# Altium PCB AX301_AX4010.PcbDoc (part 10 of 10)
Units mil, origin at the board's own origin, x right, y up, seen from the top; angles counter-clockwise.
Board outline 5185 x 3614 mil, 4 copper layers (Top Layer, GND, Mid-Layer 1, Bottom Layer); 191 components, 338 nets, 1108 pads, 420 vias.
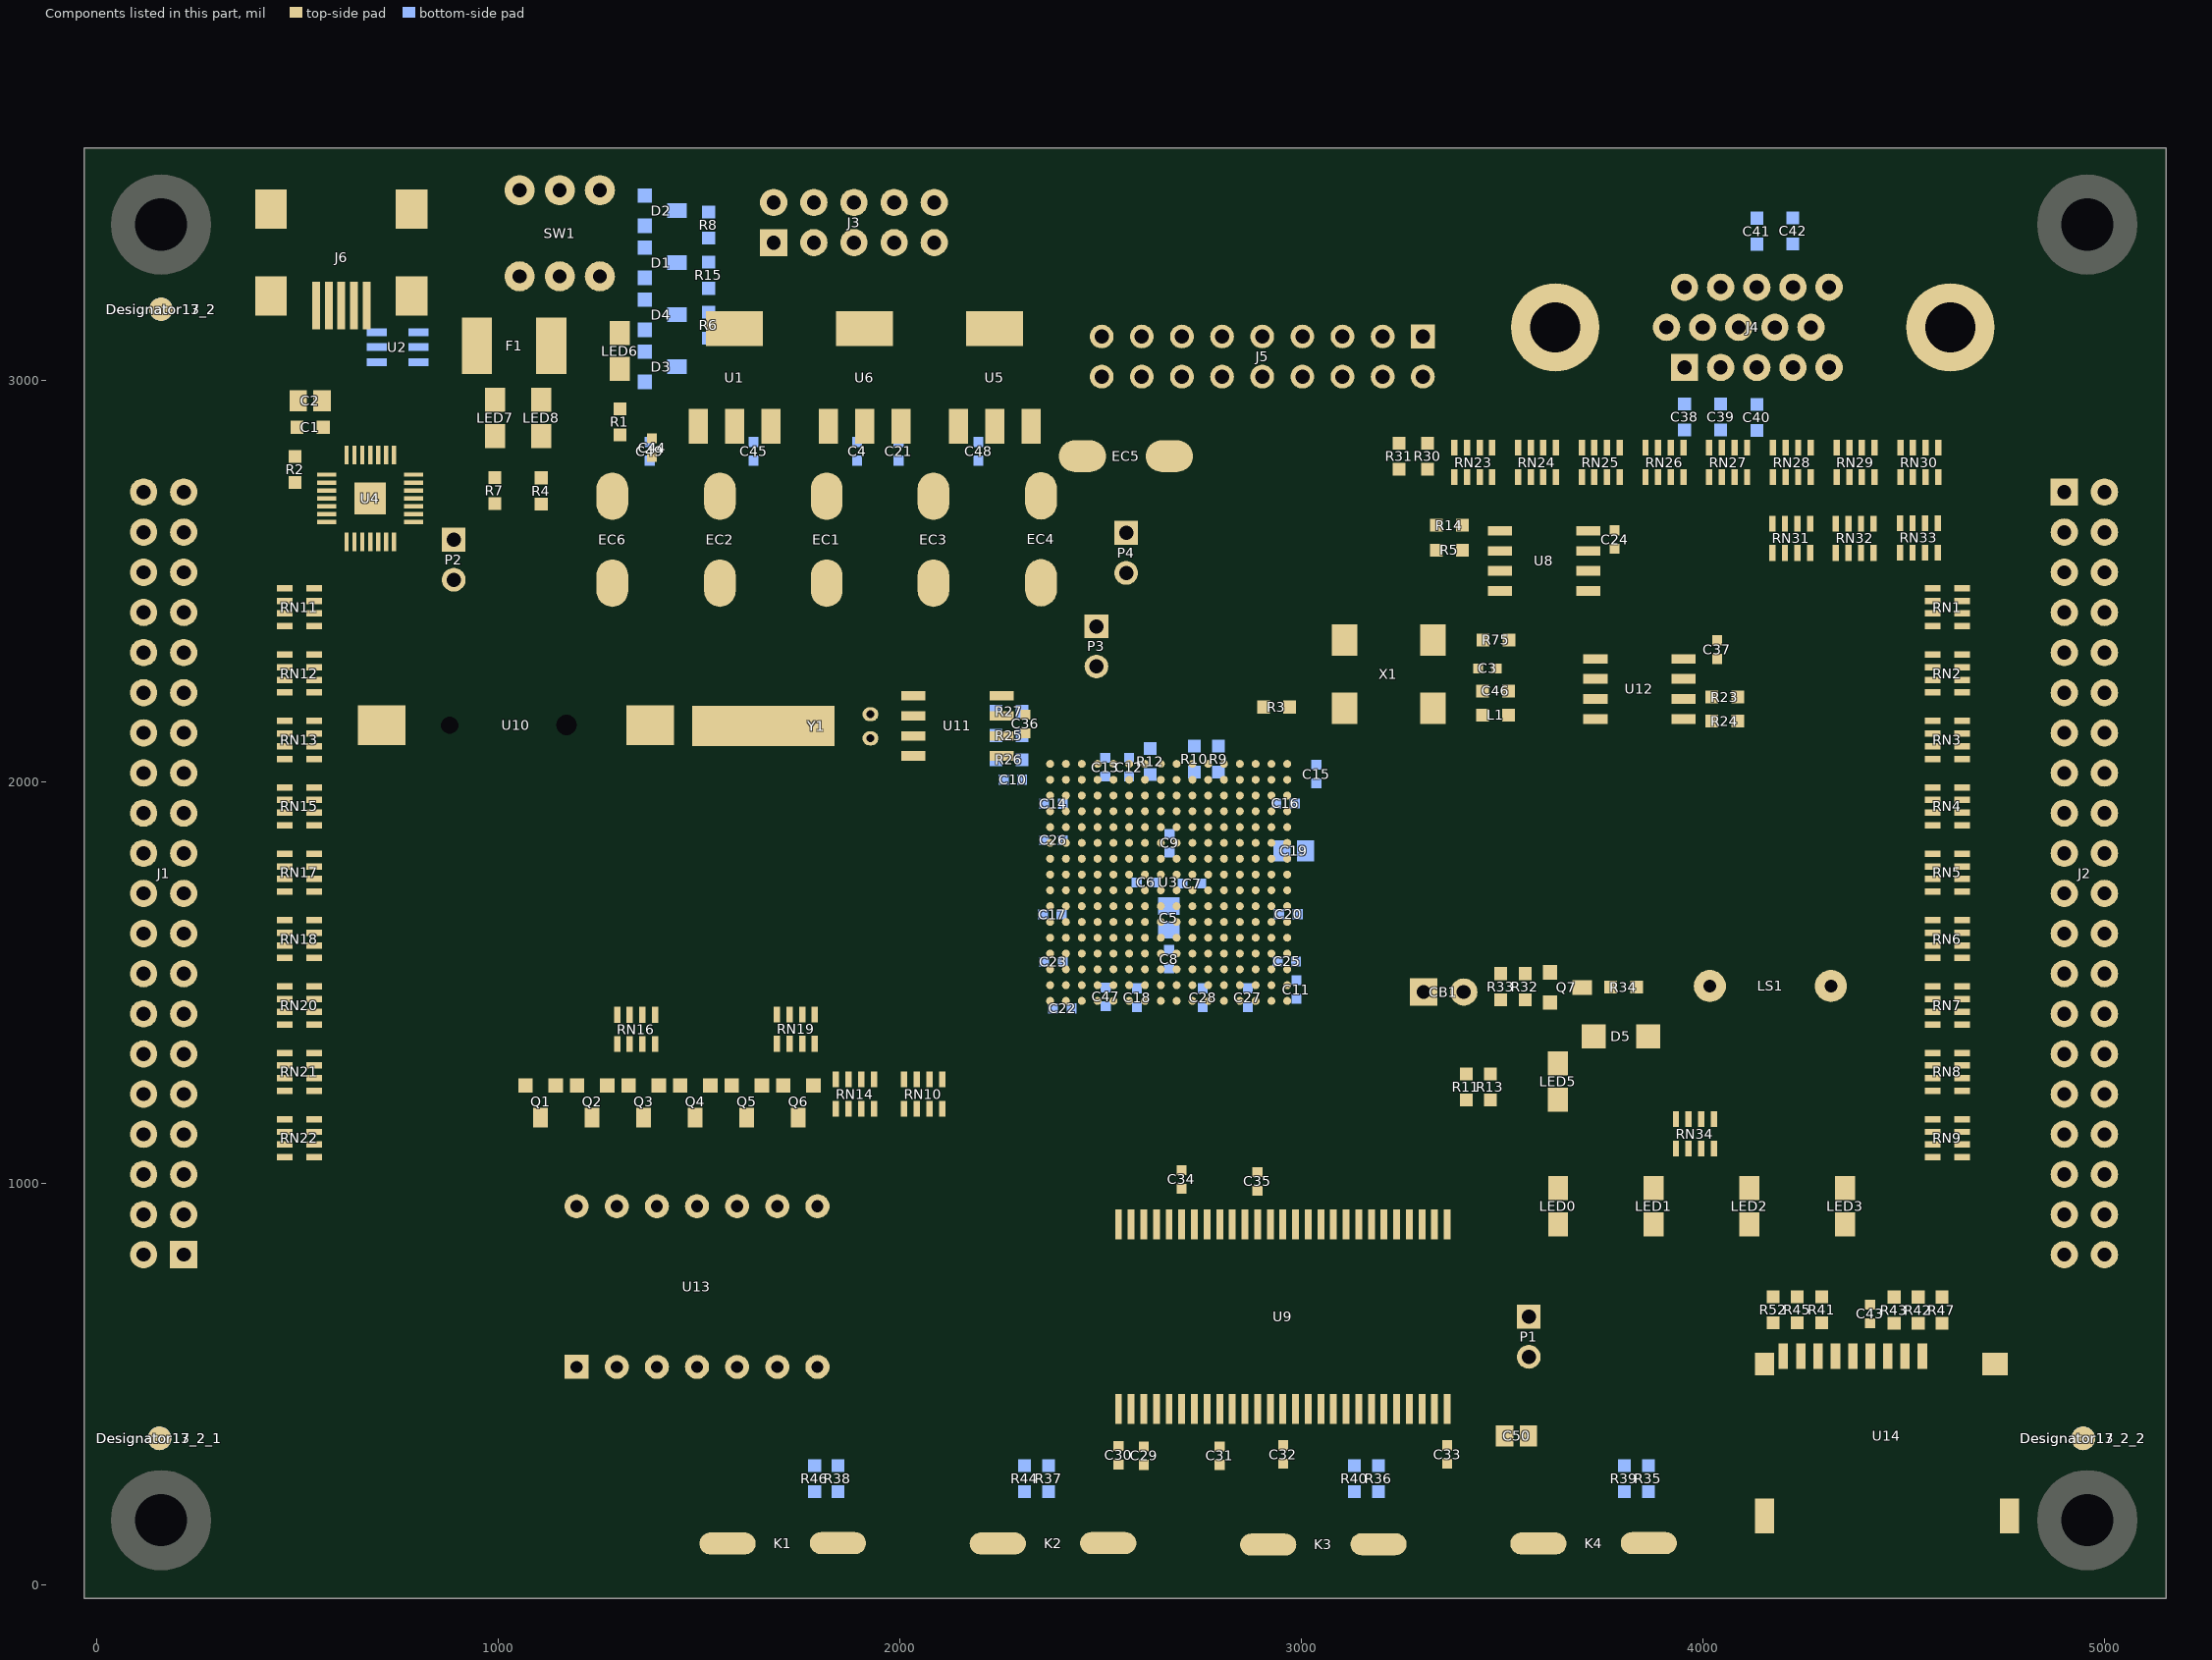
[diagram p12: the components of this part, seen from the top]

## Via types
v1: diameter 20, hole 10, Top Layer to Bottom Layer, 377 vias
v2: diameter 30, hole 15, Top Layer to Bottom Layer, 41 vias
v3: diameter 40, hole 20, Top Layer to Bottom Layer, 2 vias

## Nets (pads, with @x,y where several pads share a name; then routed paths per layer and width w, separated by ;. In a path a pad name is that pad's centre, name@x,y a point inside that pad or via, vN(x,y) a via of type N, cw(c..) or ccw(c..) an arc to the next point about the centre after c; other vN are vias at no path point) (continued)
copper on no net: (continued)
  Top Layer w0.65: 1038.8,73.7 1089.72,73.7 ; 1039.45,74.35 1090.37,74.35 ; 1039.45,75 1091.02,75 ; 1039.45,75.65 1091.67,75.65 ; 1039.45,76.3 1091.67,76.3 ; 1039.45,76.95 1092.32,76.95 ; 1040.1,77.6 1092.97,77.6 ; 1040.1,78.25 1093.62,78.25 ; 1040.1,78.9 1094.27,78.9 ; 1040.1,79.55 1094.92,79.55 ; 1040.75,80.2 1095.57,80.2 ; 1040.75,80.85 1096.22,80.85 ; 1040.75,81.5 1096.87,81.5 ; 1040.75,82.15 1097.52,82.15 ; 1040.75,82.8 1098.17,82.8 ; 1041.4,83.45 1098.17,83.45 ; 1041.4,84.1 1098.82,84.1 ; 1041.4,84.75 1099.47,84.75 ; 1041.4,85.4 1100.12,85.4 ; 1041.4,86.05 1100.77,86.05 ; 1042.05,86.7 1101.42,86.7 ; 1042.05,87.35 1102.07,87.35 ; 1042.05,88 1102.72,88 ; 1042.05,88.65 1103.37,88.65 ; 1042.7,89.3 1104.02,89.3 ; 1042.7,89.95 1104.67,89.95 ; 1042.7,90.6 1105.32,90.6 ; 1042.7,91.25 1105.32,91.25 ; 1042.7,91.9 1105.97,91.9 ; 1043.35,92.55 1106.62,92.55 ; 1043.35,93.2 1107.27,93.2 ; 1043.35,93.85 1107.92,93.85 ; 1043.35,94.5 1108.57,94.5 ; 1043.35,95.15 1109.22,95.15 ; 1044,95.8 1109.87,95.8 ; 1044,96.45 1110.52,96.45 ; 1044,97.1 1111.17,97.1 ; 1044,97.75 1111.82,97.75 ; 1044.65,98.4 1112.47,98.4 ; 1044.65,99.05 1112.47,99.05 ; 1044.65,99.7 1113.12,99.7 ; 1044.65,100.35 1113.77,100.35 ; 1044.65,101 1114.42,101 ; 1045.3,101.65 1115.07,101.65 ; 1045.3,102.3 1115.72,102.3 ; 1045.3,102.95 1116.37,102.95 ; 1045.3,103.6 1117.02,103.6 ; 1045.95,104.25 1117.67,104.25 ; 1045.95,104.9 1118.32,104.9 ; 1045.95,105.55 1118.97,105.55 ; 1045.95,106.2 1118.97,106.2 ; 1045.95,106.85 1119.62,106.85 ; 1046.6,107.5 1120.27,107.5 ; 1046.6,108.15 1120.92,108.15 ; 1046.6,108.8 1121.57,108.8 ; 1046.6,109.45 1122.22,109.45 ; 1046.6,110.1 1122.87,110.1 ; 1047.25,110.75 1123.52,110.75 ; 1047.25,111.4 1124.17,111.4 ; 1047.25,112.05 1124.82,112.05 ; 1047.25,112.7 1125.47,112.7 ; 1047.9,113.35 1126.12,113.35 ; 1047.9,114 1126.12,114 ; 1047.9,114.65 1126.77,114.65 ; 1047.9,115.3 1127.42,115.3 ; 1047.9,115.95 1128.07,115.95 ; 1048.55,116.6 1128.72,116.6 ; 1048.55,117.25 1129.37,117.25 ; 1048.55,117.9 1130.02,117.9 ; 1048.55,118.55 1130.67,118.55 ; 1048.55,119.2 1131.32,119.2 ; 1049.2,119.85 1131.97,119.85 ; 1049.2,120.5 1132.62,120.5 ; 1049.2,121.15 1133.27,121.15 ; 1049.2,121.8 1133.27,121.8 ; 1049.85,122.45 1133.92,122.45 ; 1049.85,123.1 1134.57,123.1 ; 1049.85,123.75 1135.22,123.75 ; 1049.85,124.4 1135.87,124.4 ; 1049.85,125.05 1136.52,125.05 ; 1050.5,125.7 1137.17,125.7 ; 1050.5,126.35 1137.82,126.35 ; 1050.5,127 1138.47,127 ; 1050.5,127.65 1139.12,127.65 ; 1050.5,128.3 1139.77,128.3 ; 1051.15,128.95 1139.77,128.95 ; 1051.15,129.6 1140.42,129.6 ; 1051.15,130.25 1141.07,130.25 ; 1051.15,130.9 1141.72,130.9 ; 1051.8,131.55 1142.37,131.55 ; 1051.8,132.2 1143.02,132.2 ; 1051.8,132.85 1143.67,132.85 ; 1051.8,133.5 1144.32,133.5 ; 1051.8,134.15 1144.97,134.15 ; 1052.45,134.8 1145.62,134.8 ; 1052.45,135.45 1146.27,135.45 ; 1052.45,136.1 1146.92,136.1 ; 1052.45,136.75 1146.92,136.75 ; 1052.45,137.4 1147.57,137.4 ; 1053.1,138.05 1148.22,138.05 ; 1053.1,138.7 1148.87,138.7 ; 1053.1,139.35 1149.52,139.35 ; 1053.1,140 1150.17,140 ; 1053.75,140.65 1150.82,140.65 ; 1053.75,141.3 1151.47,141.3 ; 1053.75,141.95 1152.12,141.95 ; 1053.75,142.6 1152.77,142.6 ; 1053.75,143.25 1152.12,143.25 ; 1054.4,143.9 1152.12,143.9 ; 1054.4,144.55 1151.47,144.55 ; 1054.4,145.2 1150.82,145.2 ; 1054.4,145.85 1150.82,145.85 ; 1054.4,146.5 1150.17,146.5 ; 1055.05,147.15 1150.17,147.15 ; 1055.05,147.8 1149.52,147.8 ; 1055.05,148.45 1149.52,148.45 ; 1055.05,149.1 1148.87,149.1 ; 1055.7,149.75 1148.22,149.75 ; 1055.7,150.4 1148.22,150.4 ; 1055.7,151.05 1147.57,151.05 ; 1055.7,151.7 1147.57,151.7 ; 1055.7,152.35 1146.92,152.35 ; 1056.35,153 1146.92,153 ; 1056.35,153.65 1146.27,153.65 ; 1056.35,154.3 1146.27,154.3 ; 1056.35,154.95 1145.62,154.95 ; 1057,155.6 1144.97,155.6 ; 1057,156.25 1144.97,156.25 ; 1057,156.9 1144.32,156.9 ; 1057,157.55 1144.32,157.55 ; 1057,158.2 1143.67,158.2 ; 1057.65,158.85 1143.67,158.85 ; 1057.65,159.5 1143.02,159.5 ; 1057.65,160.15 1142.37,160.15 ; 1057.65,160.8 1142.37,160.8 ; 1057.65,161.45 1141.72,161.45 ; 1058.3,162.1 1141.72,162.1 ; 1058.3,162.75 1141.07,162.75 ; 1058.3,163.4 1141.07,163.4 ; 1058.3,164.05 1140.42,164.05 ; 1058.95,164.7 1139.77,164.7 ; 1058.95,165.35 1139.77,165.35 ; 1058.95,166 1139.12,166 ; 1058.95,166.65 1139.12,166.65 ; 1058.95,167.3 1138.47,167.3 ; 1059.6,167.95 1138.47,167.95 ; 1059.6,168.6 1137.82,168.6 ; 1059.6,169.25 1137.17,169.25 ; 1059.6,169.9 1137.17,169.9 ; 1059.6,170.55 1136.52,170.55 ; 1060.25,171.2 1136.52,171.2 ; 1060.25,171.85 1135.87,171.85 ; 1060.25,172.5 1135.87,172.5 ; 1060.25,173.15 1135.22,173.15 ; 1060.9,173.8 1134.57,173.8 ; 1060.9,174.45 1134.57,174.45 ; 1060.9,175.1 1133.92,175.1 ; 1060.9,175.75 1133.92,175.75 ; 1060.9,176.4 1133.27,176.4 ; 1061.55,177.05 1133.27,177.05 ; 1061.55,177.7 1132.62,177.7 ; 1061.55,178.35 1131.97,178.35 ; 1061.55,179 1131.97,179 ; 1061.55,179.65 1131.32,179.65 ; 1062.2,180.3 1131.32,180.3 ; 1062.2,180.95 1130.67,180.95 ; 1062.2,181.6 1130.67,181.6 ; 1062.2,182.25 1130.02,182.25 ; 1062.85,182.9 1130.02,182.9 ; 1062.85,183.55 1129.37,183.55 ; 1062.85,184.2 1128.72,184.2 ; 1062.85,184.85 1128.72,184.85 ; 1062.85,185.5 1128.07,185.5 ; 1063.5,186.15 1128.07,186.15 ; 1063.5,186.8 1127.42,186.8 ; 1063.5,187.45 1127.42,187.45 ; 1063.5,188.1 1126.77,188.1 ; 1063.5,188.75 1126.12,188.75 ; 1064.15,189.4 1126.12,189.4 ; 1064.15,190.05 1125.47,190.05 ; 1064.15,190.7 1125.47,190.7 ; 1064.15,191.35 1124.82,191.35 ; 1064.8,192 1124.82,192 ; 1064.8,192.65 1124.17,192.65 ; 1064.8,193.3 1123.52,193.3 ; 1064.8,193.95 1123.52,193.95 ; 1064.8,194.6 1122.87,194.6 ; 1065.45,195.25 1122.87,195.25 ; 1065.45,195.9 1122.22,195.9 ; 1065.45,196.55 1122.22,196.55 ; 1065.45,197.2 1121.57,197.2 ; 1065.45,197.85 1120.92,197.85 ; 1066.1,198.5 1120.92,198.5 ; 1066.1,199.15 1120.27,199.15 ; 1066.1,199.8 1120.27,199.8 ; 1066.1,200.45 1119.62,200.45 ; 1066.75,201.1 1119.62,201.1 ; 1066.75,201.75 1118.97,201.75 ; 1066.75,202.4 1118.32,202.4 ; 1066.75,203.05 1118.32,203.05 ; 1066.75,203.7 1117.67,203.7 ; 1067.4,204.35 1117.67,204.35 ; 1067.4,205 1117.02,205 ; 1067.4,205.65 1117.02,205.65 ; 1067.4,206.3 1116.37,206.3 ; 1068.05,206.95 1116.37,206.95 ; 1068.05,207.6 1115.72,207.6 ; 1068.05,208.25 1115.07,208.25 ; 1068.05,208.9 1115.07,208.9 ; 1068.05,209.55 1114.42,209.55 ; 1068.7,210.2 1114.42,210.2 ; 1068.7,210.85 1113.77,210.85 ; 1068.7,211.5 1113.77,211.5 ; 1068.7,212.15 1113.12,212.15 ; 1068.7,212.8 1112.47,212.8 ; 1069.35,213.45 1112.47,213.45 ; 1069.35,214.1 1111.82,214.1 ; 1069.35,214.75 1111.82,214.75 ; 1069.35,215.4 1111.17,215.4 ; 1070,216.05 1111.17,216.05 ; 1070,216.7 1110.52,216.7 ; 1070,217.35 1109.87,217.35 ; 1070,218 1109.87,218 ; 1070,218.65 1109.22,218.65 ; 1070.65,219.3 1109.22,219.3 ; 1070.65,219.95 1108.57,219.95 ; 1070.65,220.6 1108.57,220.6 ; 1070.65,221.25 1107.92,221.25 ; 1070.65,221.9 1107.27,221.9 ; 1071.3,222.55 1107.27,222.55 ; 1071.3,223.2 1106.62,223.2 ; 1135.65,50.95 1215.82,50.95 ; 1135.65,51.6 1215.17,51.6 ; 1136.3,52.25 1215.17,52.25 ; 1136.95,52.9 1214.52,52.9 ; 1137.6,53.55 1214.52,53.55 ; 1138.25,54.2 1213.87,54.2 ; 1138.9,54.85 1213.22,54.85 ; 1139.55,55.5 1213.22,55.5 ; 1139.55,56.15 1212.57,56.15 ; 1140.2,56.8 1212.57,56.8 ; 1140.85,57.45 1211.92,57.45 ; 1141.5,58.1 1211.92,58.1 ; 1142.15,58.75 1211.27,58.75 ; 1142.8,59.4 1211.27,59.4 ; 1143.45,60.05 1210.62,60.05 ; 1143.45,60.7 1210.62,60.7 ; 1144.1,61.35 1209.97,61.35 ; 1144.75,62 1209.97,62 ; 1145.4,62.65 1209.32,62.65 ; 1146.05,63.3 1209.32,63.3 ; 1146.7,63.95 1208.67,63.95 ; 1147.35,64.6 1208.67,64.6 ; 1147.35,65.25 1208.02,65.25 ; 1148,65.9 1208.02,65.9 ; 1148.65,66.55 1207.37,66.55 ; 1149.3,67.2 1207.37,67.2 ; 1149.95,67.85 1206.72,67.85 ; 1150.6,68.5 1206.72,68.5 ; 1151.25,69.15 1206.07,69.15 ; 1151.25,69.8 1206.07,69.8 ; 1151.9,70.45 1205.42,70.45 ; 1152.55,71.1 1204.77,71.1 ; 1153.2,71.75 1204.77,71.75 ; 1153.85,72.4 1204.12,72.4 ; 1154.5,73.05 1204.12,73.05 ; 1154.5,141.3 1167.72,141.3 ; 1154.5,141.95 1167.72,141.95 ; 1154.5,142.6 1167.72,142.6 ; 1155.15,73.7 1203.47,73.7 ; 1155.15,74.35 1203.47,74.35 ; 1155.15,140 1168.37,140 ; 1155.15,140.65 1168.37,140.65 ; 1155.15,143.25 1168.37,143.25 ; 1155.8,75 1202.82,75 ; 1155.8,138.7 1169.02,138.7 ; 1155.8,139.35 1169.02,139.35 ; 1155.8,143.9 1169.02,143.9 ; 1156.45,75.65 1202.82,75.65 ; 1156.45,137.4 1170.32,137.4 ; 1156.45,138.05 1169.67,138.05 ; 1156.45,144.55 1169.67,144.55 ; 1157.1,76.3 1202.17,76.3 ; 1157.1,136.1 1170.97,136.1 ; 1157.1,136.75 1170.32,136.75 ; 1157.1,145.2 1170.32,145.2 ; 1157.75,76.95 1202.17,76.95 ; 1157.75,134.8 1171.62,134.8 ; 1157.75,135.45 1170.97,135.45 ; 1157.75,145.85 1170.97,145.85 ; 1158.4,77.6 1201.52,77.6 ; 1158.4,133.5 1172.27,133.5 ; 1158.4,134.15 1171.62,134.15 ; 1158.4,146.5 1171.62,146.5 ; 1159.05,78.25 1201.52,78.25 ; 1159.05,78.9 1200.87,78.9 ; 1159.05,132.85 1172.27,132.85 ; 1159.05,147.15 1172.27,147.15 ; 1159.7,79.55 1200.87,79.55 ; 1159.7,131.55 1172.92,131.55 ; 1159.7,132.2 1172.92,132.2 ; 1159.7,147.8 1172.92,147.8 ; 1160.35,80.2 1200.22,80.2 ; 1160.35,130.25 1173.57,130.25 ; 1160.35,130.9 1173.57,130.9 ; 1160.35,148.45 1173.57,148.45 ; 1161,80.85 1200.22,80.85 ; 1161,128.95 1174.22,128.95 ; 1161,129.6 1174.22,129.6 ; 1161,149.1 1174.22,149.1 ; 1161.65,81.5 1199.57,81.5 ; 1161.65,127.65 1174.87,127.65 ; 1161.65,128.3 1174.87,128.3 ; 1161.65,149.75 1174.87,149.75 ; 1162.3,82.15 1199.57,82.15 ; 1162.3,126.35 1175.52,126.35 ; 1162.3,127 1175.52,127 ; 1162.3,150.4 1175.52,150.4 ; 1162.95,82.8 1198.92,82.8 ; 1162.95,83.45 1198.92,83.45 ; 1162.95,125.05 1176.82,125.05 ; 1162.95,125.7 1176.17,125.7 ; 1162.95,151.05 1176.17,151.05 ; 1163.6,84.1 1198.27,84.1 ; 1163.6,123.75 1177.47,123.75 ; 1163.6,124.4 1176.82,124.4 ; 1163.6,151.7 1176.82,151.7 ; 1163.6,222.55 1242.47,222.55 ; 1163.6,223.2 1243.12,223.2 ; 1164.25,84.75 1198.27,84.75 ; 1164.25,122.45 1178.12,122.45 ; 1164.25,123.1 1177.47,123.1 ; 1164.25,152.35 1177.47,152.35 ; 1164.25,221.25 1241.17,221.25 ; 1164.25,221.9 1241.82,221.9 ; 1164.9,85.4 1197.62,85.4 ; 1164.9,121.15 1178.77,121.15 ; 1164.9,121.8 1178.12,121.8 ; 1164.9,153 1178.12,153 ; 1164.9,219.95 1239.87,219.95 ; 1164.9,220.6 1240.52,220.6 ; 1165.55,86.05 1197.62,86.05 ; 1165.55,120.5 1178.77,120.5 ; 1165.55,153.65 1178.77,153.65 ; 1165.55,218.65 1239.22,218.65 ; 1165.55,219.3 1239.22,219.3 ; 1166.2,86.7 1196.97,86.7 ; 1166.2,119.2 1179.42,119.2 ; 1166.2,119.85 1179.42,119.85 ; 1166.2,154.3 1179.42,154.3 ; 1166.2,217.35 1237.92,217.35 ; 1166.2,218 1238.57,218 ; 1166.85,87.35 1196.32,87.35 ; 1166.85,88 1196.32,88 ; 1166.85,117.9 1180.07,117.9 ; 1166.85,118.55 1180.07,118.55 ; 1166.85,154.95 1180.07,154.95 ; 1166.85,216.05 1236.62,216.05 ; 1166.85,216.7 1237.27,216.7 ; 1167.5,88.65 1195.67,88.65 ; 1167.5,116.6 1180.72,116.6 ; 1167.5,117.25 1180.72,117.25 ; 1167.5,155.6 1180.72,155.6 ; 1167.5,214.75 1235.32,214.75 ; 1167.5,215.4 1235.97,215.4 ; 1168.15,89.3 1195.67,89.3 ; 1168.15,115.3 1181.37,115.3 ; 1168.15,115.95 1181.37,115.95 ; 1168.15,156.25 1181.37,156.25 ; 1168.15,213.45 1234.67,213.45 ; 1168.15,214.1 1234.67,214.1 ; 1168.8,89.95 1195.02,89.95 ; 1168.8,114 1182.02,114 ; 1168.8,114.65 1182.02,114.65 ; 1168.8,156.9 1182.02,156.9 ; 1168.8,212.15 1233.37,212.15 ; 1168.8,212.8 1234.02,212.8 ; 1169.45,90.6 1195.02,90.6 ; 1169.45,112.7 1183.32,112.7 ; 1169.45,113.35 1182.67,113.35 ; 1169.45,157.55 1182.67,157.55 ; 1169.45,210.85 1232.07,210.85 ; 1169.45,211.5 1232.72,211.5 ; 1170.1,91.25 1194.37,91.25 ; 1170.1,111.4 1183.97,111.4 ; 1170.1,112.05 1183.32,112.05 ; 1170.1,158.2 1183.32,158.2 ; 1170.1,209.55 1230.77,209.55 ; 1170.1,210.2 1231.42,210.2 ; 1170.75,91.9 1194.37,91.9 ; 1170.75,92.55 1193.72,92.55 ; 1170.75,110.1 1184.62,110.1 ; 1170.75,110.75 1183.97,110.75 ; 1170.75,158.85 1183.97,158.85 ; 1170.75,208.25 1230.12,208.25 ; 1170.75,208.9 1230.12,208.9 ; 1171.4,93.2 1193.72,93.2 ; 1171.4,108.8 1185.27,108.8 ; 1171.4,109.45 1184.62,109.45 ; 1171.4,159.5 1184.62,159.5 ; 1171.4,206.95 1228.82,206.95 ; 1171.4,207.6 1229.47,207.6 ; 1172.05,93.85 1193.07,93.85 ; 1172.05,108.15 1185.27,108.15 ; 1172.05,160.15 1185.27,160.15 ; 1172.05,205.65 1227.52,205.65 ; 1172.05,206.3 1228.17,206.3 ; 1172.7,94.5 1193.07,94.5 ; 1172.7,106.85 1185.92,106.85 ; 1172.7,107.5 1185.92,107.5 ; 1172.7,160.8 1185.92,160.8 ; 1172.7,205 1226.87,205 ; 1173.35,95.15 1192.42,95.15 ; 1173.35,105.55 1186.57,105.55 ; 1173.35,106.2 1186.57,106.2 ; 1173.35,161.45 1186.57,161.45 ; 1173.35,203.7 1225.57,203.7 ; 1173.35,204.35 1226.22,204.35 ; 1174,95.8 1192.42,95.8 ; 1174,104.25 1187.22,104.25 ; 1174,104.9 1187.22,104.9 ; 1174,162.1 1187.22,162.1 ; 1174,202.4 1224.92,202.4 ; 1174,203.05 1224.92,203.05 ; 1174.65,96.45 1191.77,96.45 ; 1174.65,97.1 1191.77,97.1 ; 1174.65,102.95 1187.87,102.95 ; 1174.65,103.6 1187.87,103.6 ; 1174.65,162.75 1187.87,162.75 ; 1174.65,201.1 1223.62,201.1 ; 1174.65,201.75 1224.27,201.75 ; 1175.3,97.75 1191.12,97.75 ; 1175.3,101.65 1189.17,101.65 ; 1175.3,102.3 1188.52,102.3 ; 1175.3,163.4 1188.52,163.4 ; 1175.3,199.8 1222.32,199.8 ; 1175.3,200.45 1222.97,200.45 ; 1175.95,98.4 1191.12,98.4 ; 1175.95,100.35 1189.82,100.35 ; 1175.95,101 1189.17,101 ; 1175.95,164.05 1189.17,164.05 ; 1175.95,198.5 1221.02,198.5 ; 1175.95,199.15 1221.67,199.15 ; 1176.6,99.05 1189.82,99.05 ; 1176.6,99.7 1189.82,99.7 ; 1176.6,164.7 1189.82,164.7 ; 1176.6,197.2 1220.37,197.2 ; 1176.6,197.85 1220.37,197.85 ; 1177.25,165.35 1190.47,165.35 ; 1177.25,195.9 1219.07,195.9 ; 1177.25,196.55 1219.72,196.55 ; 1177.9,166 1191.12,166 ; 1177.9,194.6 1217.77,194.6 ; 1177.9,195.25 1218.42,195.25 ; 1178.55,166.65 1191.77,166.65 ; 1178.55,193.3 1216.47,193.3 ; 1178.55,193.95 1217.12,193.95 ; 1179.2,167.3 1192.42,167.3 ; 1179.2,192 1215.82,192 ; 1179.2,192.65 1215.82,192.65 ; 1179.85,167.95 1193.07,167.95 ; 1179.85,190.7 1214.52,190.7 ; 1179.85,191.35 1215.17,191.35 ; 1180.5,168.6 1193.72,168.6 ; 1180.5,189.4 1213.22,189.4 ; 1180.5,190.05 1213.87,190.05 ; 1181.15,169.25 1194.37,169.25 ; 1181.15,188.1 1211.92,188.1 ; 1181.15,188.75 1212.57,188.75 ; 1181.8,169.9 1195.67,169.9 ; 1181.8,186.8 1210.62,186.8 ; 1181.8,187.45 1211.27,187.45 ; 1182.45,170.55 1196.32,170.55 ; 1182.45,186.15 1210.62,186.15 ; 1183.1,171.2 1196.97,171.2 ; 1183.1,184.85 1209.32,184.85 ; 1183.1,185.5 1209.97,185.5 ; 1183.75,171.85 1197.62,171.85 ; 1183.75,183.55 1208.02,183.55 ; 1183.75,184.2 1208.67,184.2 ; 1184.4,172.5 1198.27,172.5 ; 1184.4,182.25 1206.72,182.25 ; 1184.4,182.9 1207.37,182.9 ; 1185.05,173.15 1198.92,173.15 ; 1185.05,180.95 1206.07,180.95 ; 1185.05,181.6 1206.07,181.6 ; 1185.7,173.8 1199.57,173.8 ; 1185.7,179.65 1204.77,179.65 ; 1185.7,180.3 1205.42,180.3 ; 1186.35,174.45 1200.22,174.45 ; 1186.35,178.35 1203.47,178.35 ; 1186.35,179 1204.12,179 ; 1187,175.1 1200.87,175.1 ; 1187,177.05 1202.17,177.05 ; 1187,177.7 1202.82,177.7 ; 1187.65,175.75 1201.52,175.75 ; 1187.65,176.4 1201.52,176.4 ; 1226.65,134.15 1332.82,134.15 ; 1226.65,134.8 1332.82,134.8 ; 1226.65,135.45 1332.82,135.45 ; 1227.3,133.5 1332.82,133.5 ; 1227.3,136.1 1332.82,136.1 ; 1227.95,132.2 1332.82,132.2 ; 1227.95,132.85 1332.82,132.85 ; 1227.95,136.75 1332.82,136.75 ; 1228.6,130.9 1332.82,130.9 ; 1228.6,131.55 1332.82,131.55 ; 1228.6,137.4 1332.82,137.4 ; 1229.25,129.6 1332.82,129.6 ; 1229.25,130.25 1332.82,130.25 ; 1229.25,138.05 1332.82,138.05 ; 1229.9,128.3 1332.82,128.3 ; 1229.9,128.95 1332.82,128.95 ; 1229.9,138.7 1332.82,138.7 ; 1230.55,127 1332.82,127 ; 1230.55,127.65 1332.82,127.65 ; 1230.55,139.35 1332.82,139.35 ; 1231.2,125.7 1332.82,125.7 ; 1231.2,126.35 1332.82,126.35 ; 1231.2,140 1332.82,140 ; 1231.85,125.05 1332.82,125.05 ; 1231.85,140.65 1332.82,140.65 ; 1232.5,123.75 1332.82,123.75 ; 1232.5,124.4 1332.82,124.4 ; 1232.5,141.3 1332.82,141.3 ; 1233.15,122.45 1332.82,122.45 ; 1233.15,123.1 1332.82,123.1 ; 1233.15,141.95 1332.82,141.95 ; 1233.8,121.15 1332.82,121.15 ; 1233.8,121.8 1332.82,121.8 ; 1233.8,142.6 1332.82,142.6 ; 1234.45,119.85 1332.82,119.85 ; 1234.45,120.5 1332.82,120.5 ; 1234.45,143.25 1332.82,143.25 ; 1235.1,118.55 1332.82,118.55 ; 1235.1,119.2 1332.82,119.2 ; 1235.1,143.9 1332.82,143.9 ; 1235.1,144.55 1332.82,144.55 ; 1235.75,117.25 1332.82,117.25 ; 1235.75,117.9 1332.82,117.9 ; 1235.75,145.2 1332.82,145.2 ; 1236.4,115.95 1332.82,115.95 ; 1236.4,116.6 1332.82,116.6 ; 1236.4,145.85 1332.82,145.85 ; 1237.05,115.3 1332.82,115.3 ; 1237.05,146.5 1332.82,146.5 ; 1237.7,114 1332.82,114 ; 1237.7,114.65 1332.82,114.65 ; 1237.7,147.15 1332.82,147.15 ; 1238.35,112.7 1332.82,112.7 ; 1238.35,113.35 1332.82,113.35 ; 1238.35,147.8 1332.82,147.8 ; 1239,111.4 1332.82,111.4 ; 1239,112.05 1332.82,112.05 ; 1239,148.45 1332.82,148.45 ; 1239.65,110.1 1332.82,110.1 ; 1239.65,110.75 1332.82,110.75 ; 1239.65,149.1 1332.82,149.1 ; 1240.3,108.8 1332.82,108.8 ; 1240.3,109.45 1332.82,109.45 ; 1240.3,149.75 1332.82,149.75 ; 1240.95,107.5 1332.82,107.5 ; 1240.95,108.15 1332.82,108.15 ; 1240.95,150.4 1332.82,150.4 ; 1241.6,106.85 1332.82,106.85 ; 1241.6,151.05 1332.82,151.05 ; 1242.25,105.55 1332.82,105.55 ; 1242.25,106.2 1332.82,106.2 ; 1242.25,151.7 1332.82,151.7 ; 1242.9,104.25 1332.82,104.25 ; 1242.9,104.9 1332.82,104.9 ; 1242.9,152.35 1332.82,152.35 ; 1242.9,153 1332.82,153 ; 1243.55,102.95 1332.82,102.95 ; 1243.55,103.6 1332.82,103.6 ; 1243.55,153.65 1332.82,153.65 ; 1244.2,101.65 1332.82,101.65 ; 1244.2,102.3 1332.82,102.3 ; 1244.2,154.3 1332.82,154.3 ; 1244.85,100.35 1332.82,100.35 ; 1244.85,101 1332.82,101 ; 1244.85,154.95 1332.82,154.95 ; 1245.5,99.05 1332.82,99.05 ; 1245.5,99.7 1332.82,99.7 ; 1245.5,155.6 1332.82,155.6 ; 1246.15,98.4 1332.82,98.4 ; 1246.15,156.25 1332.82,156.25 ; 1246.8,97.1 1332.82,97.1 ; 1246.8,97.75 1332.82,97.75 ; 1246.8,156.9 1332.82,156.9 ; 1247.45,95.8 1332.82,95.8 ; 1247.45,96.45 1332.82,96.45 ; 1247.45,157.55 1332.82,157.55 ; 1248.1,94.5 1332.82,94.5 ; 1248.1,95.15 1332.82,95.15 ; 1248.1,158.2 1332.82,158.2 ; 1248.75,93.2 1332.82,93.2 ; 1248.75,93.85 1332.82,93.85 ; 1248.75,158.85 1332.82,158.85 ; 1249.4,91.9 1332.82,91.9 ; 1249.4,92.55 1332.82,92.55 ; 1249.4,159.5 1332.82,159.5 ; 1250.05,90.6 1332.82,90.6 ; 1250.05,91.25 1332.82,91.25 ; 1250.05,160.15 1332.82,160.15 ; 1250.7,89.3 1332.82,89.3 ; 1250.7,89.95 1332.82,89.95 ; 1250.7,160.8 1332.82,160.8 ; 1251.35,88.65 1332.82,88.65 ; 1251.35,161.45 1332.82,161.45 ; 1251.35,162.1 1332.82,162.1 ; 1252,87.35 1332.82,87.35 ; 1252,88 1332.82,88 ; 1252,162.75 1332.82,162.75 ; 1252.65,86.05 1332.82,86.05 ; 1252.65,86.7 1332.82,86.7 ; 1252.65,163.4 1332.82,163.4 ; 1253.3,84.75 1332.82,84.75 ; 1253.3,85.4 1332.82,85.4 ; 1253.3,164.05 1332.82,164.05 ; 1253.95,83.45 1332.82,83.45 ; 1253.95,84.1 1332.82,84.1 ; 1253.95,164.7 1332.82,164.7 ; 1254.6,82.15 1332.82,82.15 ; 1254.6,82.8 1332.82,82.8 ; 1254.6,165.35 1332.82,165.35 ; 1255.25,80.85 1332.82,80.85 ; 1255.25,81.5 1332.82,81.5 ; 1255.25,166 1332.82,166 ; 1255.9,80.2 1332.82,80.2 ; 1255.9,166.65 1332.82,166.65 ; 1256.55,78.9 1332.82,78.9 ; 1256.55,79.55 1332.82,79.55 ; 1256.55,167.3 1332.82,167.3 ; 1257.2,77.6 1332.82,77.6 ; 1257.2,78.25 1332.82,78.25 ; 1257.2,167.95 1332.82,167.95 ; 1257.85,76.3 1332.82,76.3 ; 1257.85,76.95 1332.82,76.95 ; 1257.85,168.6 1332.82,168.6 ; 1258.5,75 1332.82,75 ; 1258.5,75.65 1332.82,75.65 ; 1258.5,169.25 1332.82,169.25 ; 1259.15,73.7 1332.82,73.7 ; 1259.15,74.35 1332.82,74.35 ; 1259.15,169.9 1332.82,169.9 ; 1259.15,170.55 1332.82,170.55 ; 1259.8,72.4 1332.82,72.4 ; 1259.8,73.05 1332.82,73.05 ; 1259.8,171.2 1332.82,171.2 ; 1260.45,71.1 1332.82,71.1 ; 1260.45,71.75 1332.82,71.75 ; 1260.45,171.85 1332.82,171.85 ; 1261.1,70.45 1332.82,70.45 ; 1261.1,172.5 1332.82,172.5 ; 1261.75,69.15 1332.82,69.15 ; 1261.75,69.8 1332.82,69.8 ; 1261.75,173.15 1332.82,173.15 ; 1262.4,67.85 1332.82,67.85 ; 1262.4,68.5 1332.82,68.5 ; 1262.4,173.8 1332.82,173.8 ; 1263.05,66.55 1332.82,66.55 ; 1263.05,67.2 1332.82,67.2 ; 1263.05,174.45 1332.82,174.45 ; 1263.7,65.25 1332.82,65.25 ; 1263.7,65.9 1332.82,65.9 ; 1263.7,175.1 1332.82,175.1 ; 1264.35,63.95 1332.82,63.95 ; 1264.35,64.6 1332.82,64.6 ; 1264.35,175.75 1332.82,175.75 ; 1265,62.65 1332.82,62.65 ; 1265,63.3 1332.82,63.3 ; 1265,176.4 1332.82,176.4 ; 1265.65,62 1332.82,62 ; 1265.65,177.05 1332.82,177.05 ; 1266.3,60.7 1332.82,60.7 ; 1266.3,61.35 1332.82,61.35 ; 1266.3,177.7 1332.82,177.7 ; 1266.95,59.4 1332.82,59.4 ; 1266.95,60.05 1332.82,60.05 ; 1266.95,178.35 1332.82,178.35 ; 1267.6,58.1 1332.82,58.1 ; 1267.6,58.75 1332.82,58.75 ; 1267.6,179 1332.82,179 ; 1267.6,179.65 1332.82,179.65 ; 1268.25,56.8 1332.82,56.8 ; 1268.25,57.45 1332.82,57.45 ; 1268.25,180.3 1332.82,180.3 ; 1268.9,55.5 1332.82,55.5 ; 1268.9,56.15 1332.82,56.15 ; 1268.9,180.95 1332.82,180.95 ; 1269.55,54.2 1332.82,54.2 ; 1269.55,54.85 1332.82,54.85 ; 1269.55,181.6 1332.82,181.6 ; 1270.2,53.55 1332.82,53.55 ; 1270.2,182.25 1332.82,182.25 ; 1270.85,52.25 1332.82,52.25 ; 1270.85,52.9 1332.82,52.9 ; 1270.85,182.9 1332.82,182.9 ; 1271.5,50.95 1332.82,50.95 ; 1271.5,51.6 1332.82,51.6 ; 1271.5,183.55 1332.82,183.55 ; 1272.15,184.2 1332.82,184.2 ; 1272.8,184.85 1332.82,184.85 ; 1273.45,185.5 1332.82,185.5 ; 1274.1,186.15 1332.82,186.15 ; 1274.75,186.8 1332.82,186.8 ; 1275.4,187.45 1332.82,187.45 ; 1275.4,188.1 1332.82,188.1 ; 1276.05,188.75 1332.82,188.75 ; 1276.7,189.4 1332.82,189.4 ; 1277.35,190.05 1332.82,190.05 ; 1278,190.7 1332.82,190.7 ; 1278.65,191.35 1332.82,191.35 ; 1279.3,192 1332.82,192 ; 1279.95,192.65 1332.82,192.65 ; 1280.6,193.3 1332.82,193.3 ; 1281.25,193.95 1332.82,193.95 ; 1281.9,194.6 1332.82,194.6 ; 1282.55,195.25 1332.82,195.25 ; 1283.2,195.9 1332.82,195.9 ; 1283.2,196.55 1332.82,196.55 ; 1283.85,197.2 1332.82,197.2 ; 1284.5,197.85 1332.82,197.85 ; 1285.15,198.5 1332.82,198.5 ; 1285.8,199.15 1332.82,199.15 ; 1286.45,199.8 1332.82,199.8 ; 1287.1,200.45 1332.82,200.45 ; 1287.75,201.1 1332.82,201.1 ; 1288.4,201.75 1332.82,201.75 ; 1289.05,202.4 1332.82,202.4 ; 1289.7,203.05 1332.82,203.05 ; 1290.35,203.7 1332.82,203.7 ; 1291,204.35 1332.82,204.35 ; 1291.65,205 1332.82,205 ; 1291.65,205.65 1332.82,205.65 ; 1292.3,206.3 1332.82,206.3 ; 1292.95,206.95 1332.82,206.95 ; 1293.6,207.6 1332.82,207.6 ; 1294.25,208.25 1332.82,208.25 ; 1294.9,208.9 1332.82,208.9 ; 1295.55,209.55 1332.82,209.55 ; 1296.2,210.2 1332.82,210.2 ; 1296.85,210.85 1332.82,210.85 ; 1297.5,211.5 1332.82,211.5 ; 1298.15,212.15 1332.82,212.15 ; 1298.8,212.8 1332.82,212.8 ; 1299.45,213.45 1332.82,213.45 ; 1299.45,214.1 1332.82,214.1 ; 1300.1,214.75 1332.82,214.75 ; 1300.75,215.4 1332.82,215.4 ; 1301.4,216.05 1332.82,216.05 ; 1302.05,216.7 1332.82,216.7 ; 1302.7,217.35 1332.82,217.35 ; 1303.35,218 1332.82,218 ; 1304,218.65 1332.82,218.65 ; 1304.65,219.3 1332.82,219.3 ; 1305.3,219.95 1332.82,219.95 ; 1305.95,220.6 1332.82,220.6 ; 1306.6,221.25 1332.82,221.25 ; 1307.25,221.9 1332.82,221.9 ; 1307.9,222.55 1332.82,222.55 ; 1307.9,223.2 1332.82,223.2

## Polygon pours and split planes (outlines as drawn)
GND on Bottom Layer "Bottom Layer-No Net" (hatched 45Degree grid 20 track 5, remove dead copper, pour order 4): -31,3584 5149,3584 5149,-26 5165,-42 -31,-42 -31,3584 -35,3588
D1V2 on Bottom Layer "Bottom Layer-No Net" (solid, pour order 7): 2453.22,1967 2887,1967 2887,1913.5 2887,1531 2449,1531 2453.22,1531 2453.22,1967
D2V5 on GND (split plane): 1940.45,1806 1940.64,1805.02 1941.2,1804.2 1942.02,1803.64 1943,1803.45 2533,1803.45 2533.98,1803.64 2534.8,1804.2 2535.36,1805.02 2535.55,1806 2535.55,1922.45 2607.45,1922.45 2607.45,1650 2607.64,1649.02 2608.2,1648.2 2609.02,1647.64 2610,1647.45 2804.45,1647.45 2804.45,1574.18 2535.55,1574.18 2535.55,1692 2535.36,1692.98 2534.8,1693.8 2533.98,1694.36 2533,1694.55 1846.55,1694.55 1846.55,2774.45 1940.45,2774.45
GND on GND (split plane): 5133.9,3242.3 5133.9,-14.6 -10.9,-14.6 -10.9,3559.2 5133.9,3559.2

## Keep-outs
Keep-Out Layer:
  lines w8: 0,121.01 0,3422.3 cw(c120.71,3422.3) 120.71,3543.01 ; 0.29,121.01 ccw(c121,121.01) 121,0.3 ; 117,0 4997.29,0 ccw(c4997.3,120.71) 5118.01,120.71 ; 121.01,3543.31 4997.29,3543.31 ; 4997.29,3543.01 cw(c4997.29,3422.3) 5118,3422.3 ; 5118.11,117.3 5118.11,3422.3

## Other copper
Top Layer:
  rectangle net GND: 2091,2793 2171,3017
  rectangle net GND: 1798,2794 1846,2856
  rectangle net D3V3: 868,1150 1029,1287
  rectangle net D3V3: 2334,2829 2449,3229
  rectangle net GND: 2609,2769 2732,2900
  rectangle net GND: 1970,2434 2123,2560
  rectangle net GND: 1508,2433 1643,2558
  rectangle net GND: 1243,2434 1370,2561
  rectangle net GND: 1719,2433 1863,2558
  rectangle net GND: 2423,2357 2521,2460
  rectangle net GND: 2307,2436 2482,2565
  rectangle net GND: 3038,2313 3139,2390
  rectangle net VCC: 1680,2648 1734,3276
  rectangle net VCC: 2006,2648 2076,3276
  rectangle net NetC3_1: 3296,2143 3454,2274
  rectangle net VBUS: 662,3066 733,3246
  rectangle net GND: 482,3049 556,3245
  rectangle net NetF1_2: 1111,3016 1196,3514
  rectangle net VBUS: 662,3056 983,3116
  rectangle net D3V3: 1565,2796 1613,3143
  rectangle net GND: 1366,2843 1522,2929
  rectangle net GND: 4130,130 4179,310
  rectangle net GND: 4741,127 4788,311
  rectangle net GND: 4697,438 4761,576
  rectangle net VCC: 551,2791 627,2840
  rectangle net GND: 651,2092 768,2276
  rectangle net VCC: 549,2759 597,2840
  rectangle net D3V3: 1430,2788 1613,2824
  rectangle net D3V3: 1242,2648 1470,2824
  rectangle net VCC: 1655,2660 1704,2928
  rectangle net VCC: 1512,2648 1704,2771
  rectangle net D2V5: 1880,2649 1938,3111
  rectangle net D2V5: 1776,2650 1915,2774
  rectangle net VCC: 1977,2649 2028,2930
  rectangle net VCC: 1980,2648 2128,2774
  rectangle net D1V2: 2212,2643 2268,3128
  rectangle net D1V2: 2212,2643 2395,2776
  rectangle net D3V3: 2303,2802 2514,2929
  rectangle net D3V3: 2396,2805 2514,2926
  rectangle net GND: 3465,2432 3525,2487
  rectangle net D3V3: 3684,2564 3746,2696
Mid-Layer 1:
  rectangle net D3V3: 340,1149 2255,1286
  rectangle net D3V3: 340,1177 456,2751
  rectangle net D3V3: 2149,3079 2439,3215
  rectangle net VCC: 1601,2649 1669,2769
  rectangle net D3V3: 81,2675 1405,2762
  rectangle net D3V3: 1295,2646 1410,3188
  rectangle net D3V3: 1295,3078 2309,3215
  rectangle net D2V5: 1865,2646 1935,3056
  rectangle net D2V5: 1775,2968 1933,3062
  rectangle net D3V3: 2171,2412 2231,3180
  rectangle net D3V3: 437,2646 1410,2761
Bottom Layer:
  rectangle net GND: 2707,1393.61 2780,1461
  rectangle net GND: 467,3035 571,3140
  rectangle net D3V3: 2626,1155 2692,1490
  rectangle net D3V3: 2162,1151 2691,1286
  rectangle net VCC: 1982,2648 2017,2813
  rectangle net D3V3: 1344,2648 1411,2812
  rectangle net VCC: 1608,2648 1661,2814
  rectangle net D2V5: 1857,2649 1937,2813
  rectangle net D1V2: 2821.63,1532 2846.26,1536.98
  rectangle net D1V2: 2607,1773 2614.59,1838
  rectangle net D1V2: 2647,1561 2694,1623
  rectangle net D1V2: 2026,1726 2614.59,1773
  rectangle net D1V2: 2649.5,1886.85 2694.5,1892.5
  rectangle net D1V2: 2763.61,1767 2773.5,1768.5
  rectangle net D1V2: 2620,1607 2732,1652.59
  rectangle net D1V2: 2646,1843 2770,1891
  rectangle net GND: 2620,1658 2722,1838
  rectangle net D1V2: 2026,1740 2096,2777
  rectangle net D1V2: 2026,2647 2305,2775
  rectangle net D1V2: 2451,1926 2494,1968
  rectangle net D1V2: 2569,1804 2613.46,1850
  rectangle net D1V2: 2881.93,1629.79 2887,1710.73
  rectangle net D1V2: 2863.54,1571.88 2882,1576
  rectangle net D1V2: 2882,1567 2887,1592.62
  rectangle net D1V2: 2846.26,1532 2887,1571.88
  rectangle net D1V2: 2767.2,1720.44 2773.5,1767
  rectangle net D1V2: 2727,1646.18 2769,1847
  rectangle net GND: 3858,3084.73 4129.65,3176
  rectangle net D2V5: 1608,2992 1866,3061
  rectangle net GND: 1799,2794 1845,2845
  rectangle net GND: 2103,2794 2166,2851
  rectangle net D3V3: 2114,2204 2233,2584
  rectangle net GND: 1402,2832 1457,2940
  rectangle net GND: 1611,2821.5 1661,2871.24
  rectangle net GND: 2079,2984 2152,3025
  rectangle net GND: 2334.76,1903.95 2380,1970
GND (plane layer: these items are gaps in the copper):
  lines w5: 1844,1692 2533,1692 2533,1571.63 2728,1571.63 2770,1571.63 2807,1571.63 2807,1650 2730,1650 2610,1650 2610,1925 2533,1925 2533,1806 1943,1806 1943,2777 1844,2777 1844,1692

## Silkscreen, mask and mechanical layers (free items; w line width, h text height)
Top Overlay:
  drawing of 2922 lines, arcs and shapes, not listed
  text "PWR" at 895,3362 h80 r90
  text "VGA" at 3482,3361 h80 r90
  text "JTAG" at 2368,3334 h80 r90
  text "【39】" at 193,3112 h80 r270
  text "【40】" at 80,3111 h80 r270
  text "PWR" at 1242,3019 h60 r90
  text "【1】" at 4924,2964 h80 r90
  text "【2】" at 5031,2964 h80 r90
  text "CAMERA" at 2759,2867 h80
  text "GND" at 2645,2598 h60
  text "GND" at 975,2585 h60
  text "IO: 3.3V" at 4769,2574 h100 r90
  text "1.2V" at 2646,2494 h60
  text "5V" at 999,2473 h60
  text "GND" at 2570,2370 h60
  text "2.5V" at 2574,2268 h60
  text "IO: 3.3V" at 352,944 h100 r270
  text "GND" at 3647,650 h60
  text "【2】" at 93,573 h80 r270
  text "【1】" at 193,573 h80 r270
  text "3.3V" at 3650,545 h60
  text "【39】" at 4924,438 h80 r90
  text "【40】" at 5037,435 h80 r90
Bottom Overlay:
  lines w8: 301.61,1567.33 660,1567.33 ; 302,1067.33 660,1067.33 ; 302,1267.33 660,1267.33 ; 302.31,2167.33 657,2167.33 ; 302.62,1367.33 660,1367.33 ; 303,867.33 660,867.33 660,969.33 303,969.33 ; 303,1167.33 659,1167.33 ; 303,1467.33 659.16,1467.33 ; 303,1666.33 660,1666.33 ; 303,1767.33 659,1767.33 ; 303,1867.33 657,1867.33 ; 303,1967.33 659,1967.33 ; 303,2068.33 656.86,2068.33 ; 303,2267.33 656.87,2267.33 ; 303,2367.33 657,2367.33 ; 303,2467.33 659,2467.33 ; 303,2570.33 658,2570.33 ; 303,2667.33 657,2667.33 ; 478,767.68 479,767.68 479,2770.33 ; 4471,1871.67 4828,1871.67 ; 4471,1970.67 4829.39,1970.67 ; 4471,2170.67 4828.38,2170.67 ; 4471,2270.67 4829,2270.67 ; 4471,2470.67 4829,2470.67 ; 4471.84,2070.67 4828,2070.67 ; 4472,1070.67 4828,1070.67 ; 4472,1570.67 4828,1570.67 ; 4472,1770.67 4828,1770.67 ; 4472,2370.67 4828,2370.67 ; 4473,967.67 4828,967.67 ; 4474,870.67 4828,870.67 ; 4474,1170.67 4828,1170.67 ; 4474,1370.67 4828.69,1370.67 ; 4474,1670.67 4828,1670.67 ; 4474.13,1270.67 4828,1270.67 ; 4474.14,1469.67 4828,1469.67 ; 4652,767.67 4652,2770.32 4653,2770.32 ; 4828,2568.67 4471,2568.67 4471,2670.67 4828,2670.67
  lines w12: 303,2770.33 303,767.33 660,767.33 660,2772.33 303,2772.33 ; 4828,765.67 4471,765.67 4471,2770.67 4828,2770.67 4828,767.67
  text "【1】" at 4618,2806 h80
  text "【2】" at 4793,2804.38 h80
  text "3V3" at 647,2695 h80
  text "GND" at 4634,2694.67 h80
  text "3V3" at 468,2693 h80
  text "VCC" at 4815,2691.91 h80
  text "B1" at 4634,2594 h80
  text "J16" at 4815,2594 h80
  text "GND" at 468,2592 h80
  text "GND" at 647,2592 h80
  text "N2" at 468,2494 h80
  text "A2" at 4815,2494 h80
  text "B3" at 4634,2493 h80
  text "P1" at 647,2491 h80
  text "B4" at 4634,2397 h80
  text "A3" at 4815,2395 h80
  text "P2" at 468,2392 h80
  text "R1" at 647,2392 h80
  text "K9" at 647,2294 h80
  text "A4" at 4815,2293 h80
  text "P8" at 468,2292 h80
  text "B5" at 4634,2292 h80
  text "B6" at 4634,2195.67 h80
  text "A5" at 4815,2192.67 h80
  text "L9" at 468,2191 h80
  text "L10" at 647,2191 h80
  text "B7" at 4634,2095 h80
  text "T2" at 647,2093 h80
  text "A6" at 4815,2093.67 h80
  text "M9" at 468,2092 h80
  text "B8" at 4634,1995 h80
  text "P3" at 468,1993 h80
  text "A7" at 4815,1992.67 h80
  text "T3" at 647,1991 h80
  text "B9" at 4634,1895 h80
  text "R3" at 468,1894 h80
  text "A8" at 4815,1893 h80
  text "T4" at 647,1892 h80
  text "A9" at 4815,1794 h80
  text "B10" at 4634,1793 h80
  text "R4" at 468,1792 h80
  text "T5" at 647,1792 h80
  text "B11" at 4634,1695 h80
  text "A10" at 4815,1694 h80
  text "R5" at 468,1692 h80
  text "T6" at 647,1692 h80
  text "A11" at 4815,1596 h80
  text "B12" at 4634,1593 h80
  text "R6" at 468,1592.13 h80
  text "T7" at 647,1592.13 h80
  text "B13" at 4634,1495 h80
  text "T8" at 647,1494 h80
  text "A12" at 4815,1494 h80
  text "R7" at 468,1492 h80
  text "D5" at 4634,1396 h80
  text "A13" at 4815,1394 h80
  text "R8" at 468,1391.82 h80
  text "T9" at 647,1391 h80
  text "C6" at 4634,1294 h80
  text "D6" at 4815,1293 h80
  text "R9" at 468,1292 h80
  text "T10" at 647,1288 h80
  text "F8" at 4634,1196 h80
  text "E7" at 4815,1193 h80
  text "R10" at 468,1192 h80
  text "T11" at 647,1192 h80
  text "D8" at 4634,1096 h80
  text "C8" at 4815,1093 h80
  text "R11" at 468,1090 h80
  text "T12" at 647,1090 h80
  text "T13" at 647,994 h80
  text "E9" at 4634,993 h80
  text "E8" at 4815,992 h80
  text "R12" at 468,991 h80
  text "R13" at 468,893 h80
  text "T14" at 647,892 h80
  text "GND" at 4634,890.67 h80
  text "GND" at 4815,890.67 h80
  text "VCC" at 468,793 h80
  text "GND" at 647,793 h80
  text "3V3" at 4634,792.67 h80
  text "3V3" at 4815,790.67 h80
  text "【2】" at 450,681 h80
  text "【1】" at 629,678 h80
Top Solder:
  drawing of 2495 lines, arcs and shapes, not listed
Mechanical 4:
  circle w10: c160,160 r64.41
  circle w10: c160,3388 r65.12
  circle w10: c4958.11,3388 r64.8
  circle w10: c4958.11,160 r64.22
  lines w8: 0,3422 0,3178 ccw(c28.39,3178) 28.39,3149.61 368,3149.61 368,393.7 29,393.7 ccw(c29,364.99) 0.29,364.99 ; 0,3422.6 cw(c120.71,3422.6) 120.71,3543.31 ; 0.29,120.71 0.29,364.99 ; 0.29,121.31 ccw(c121,121.31) 121,0.6 ; 0.29,363 0.29,364.99 ; 120.71,3542.71 955.45,3542.71 ; 121,0 1315,0 ccw(c1315,27) 1342,27 1342,28 ; 953,3542.71 955.45,3542.71 ; 1320.81,3200.95 2389,3200.95 2389,3505 2389,3517.31 cw(c2415,3517.31) 2415,3543.31 4997.29,3543.31 cw(c4997.29,3422.6) 5118,3422.6 ; 1321,3200.95 986.16,3200.95 986.16,3512 ccw(c955.45,3512) 955.45,3542.71 ; 1342.24,27.24 1342.24,256 4114,256 4114,26 ccw(c4140,26) 4140,0 4997.3,0 ; 4997.3,0.3 ccw(c4997.3,121.01) 5118.01,121.01 ; 5118.01,120.41 5118.01,365.9 5118.11,366 ; 5118,3422 5118.11,3422 5118.11,3178.72 ; 5118.11,367.7 ccw(c5092.11,367.7) 5092.11,393.7 4745,393.7 4745,3149.61 5089,3149.61 ccw(c5089,3178.72) 5118.11,3178.72 ; 5118.11,3203 5118.11,3178.72

## Dimensions
121.01,3543.31 to 117,0 on Drill Drawing
0,121.01 to 5118.11,117.3 on Drill Drawing

## Text inside footprints (layer, text, board x,y; h text height)
J5: Top Overlay "1" at 3403,3129.17 h60 r180; Top Overlay "2" at 3408,3019.17 h60 r180